# EAGLE board NixieBoard (EAGLE 9.6.2)
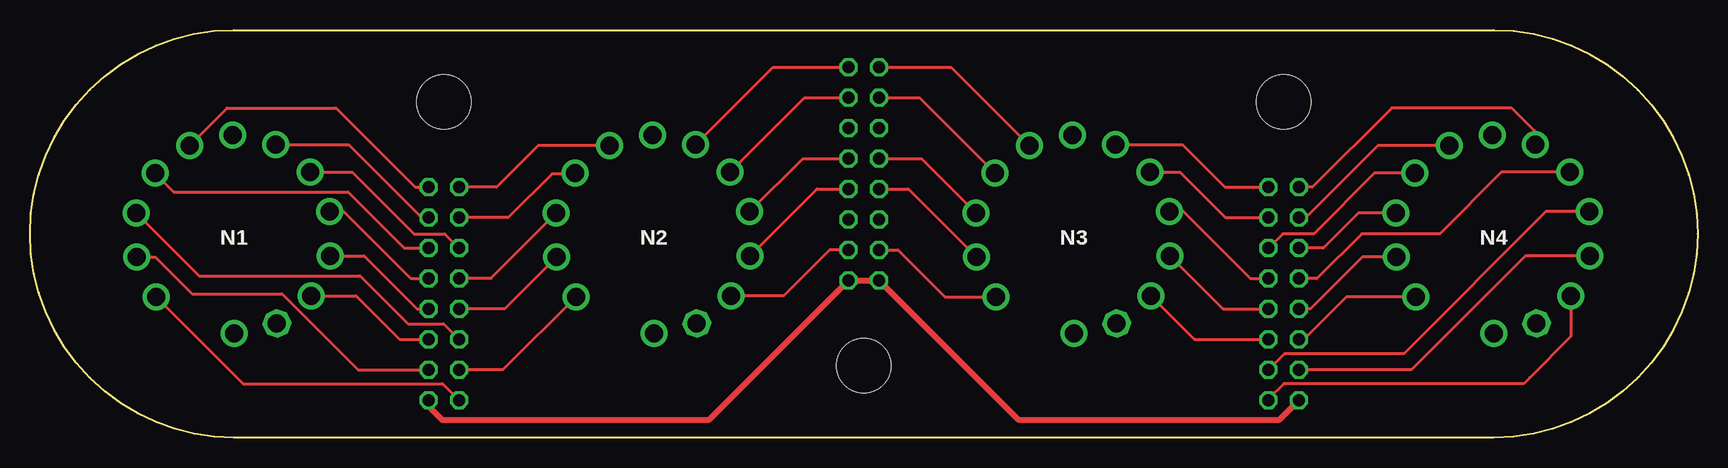
[diagram p0: board, top side]
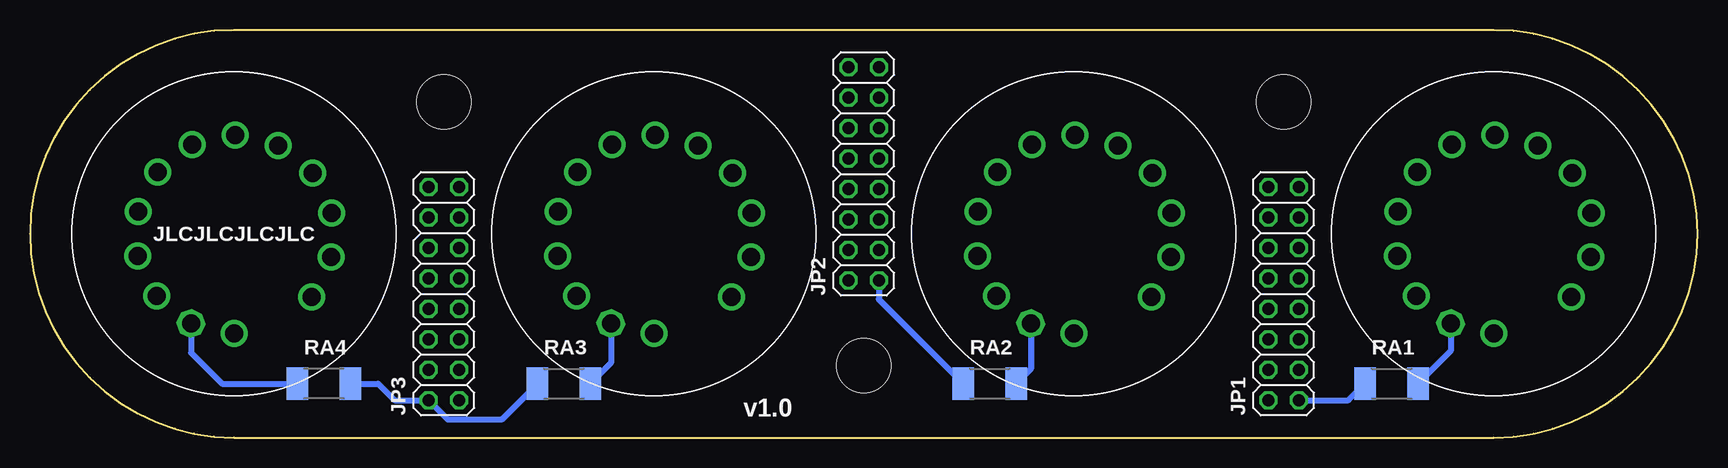
[diagram p1: board, bottom side, seen from below]

Size 139 x 34 mm. Coordinates in mm from the lower left corner, seen from the top.
Outline: 17,34 122,34 arc-180 122,0 17,0 arc-180 17,34
Copper layers (1*16): Top 0.035mm / dielectric 1.5mm / Bottom 0.035mm
Design rules "default": minimum track width 6mil, minimum drill 0.35mm, track to track 6mil, track to pad 6mil, pad to pad 6mil, via to via 6mil, smd to smd 6mil, copper to edge 40mil, drill to drill 6mil, minimum pad ring 10mil, minimum via ring 8mil, stop-mask expansion 4mil, vias tented up to drill 0mil, thermal gap 10mil
Holes 4.5 mm at 34.5,28 104.5,28 69.5,6

## Footprints (pad centres in the part's own frame; a part is rotated, then mirrored left to right if it is on the bottom)
2X08 = drill 1.016 octagon: 1 -8.89,-1.27; 2 -8.89,1.27; 3 -6.35,-1.27; 4 -6.35,1.27; 5 -3.81,-1.27; 6 -3.81,1.27; 7 -1.27,-1.27; 8 -1.27,1.27; 9 1.27,-1.27; 10 1.27,1.27; 11 3.81,-1.27; 12 3.81,1.27; 13 6.35,-1.27; 14 6.35,1.27; 15 8.89,-1.27; 16 8.89,1.27
F9057PIN = drill 1.5: 0 6.444,-5.171; 1 -6.493,-5.256; 2 -8.111,-1.95; 3 -8.134,1.73; 4 -6.559,5.056; 5 -3.696,7.37; 6 3.48,7.417; 7 6.373,5.142; 8 7.992,1.836; 9 8.018,-1.844; CI1 0,-8.33; CI2 -0.113,8.212 | drill 1.5 octagon: A 3.582,-7.486
R2010 = smd 1.8 x 2.7: 1 -2.2,0; 2 2.2,0

## Placement (x,y rotation side)
JP1  [2X08]  34.5,12 90 bottom
JP2  [2X08]  69.5,22 90 bottom
JP3  [2X08]  104.5,12 90 bottom
N1  F9057TUBE  [F9057PIN]  17,17 0 top
N2  F9057TUBE  [F9057PIN]  52,17 0 top
N3  F9057TUBE  [F9057PIN]  87,17 0 top
N4  F9057TUBE  [F9057PIN]  122,17 0 top
RA1  30k  [R2010]  25.5,4.5 0 bottom
RA2  47k  [R2010]  59,4.5 0 bottom
RA3  47k  [R2010]  94.5,4.5 0 bottom
RA4  47k  [R2010]  114.5,4.5 180 bottom

## Library data of the parts
JP1-JP3 = pinhead
N1-N4 = F9057
RA1-RA4 = rcl; SPICEPREFIX: R

## Nets
0XXX: JP1.5 N1.0
1XXX: JP1.2 N1.1
2XXX: JP1.3 N1.2
3XXX: JP1.6 N1.3
4XXX: JP1.11 N1.4
5XXX: JP1.15 N1.5
6XXX: JP1.13 N1.6
7XXX: JP1.12 N1.7
8XXX: JP1.9 N1.8
9XXX: JP1.7 N1.9
N$3: JP2.5
N$6: JP2.11
N$11: JP2.12
N$14: JP2.6
N$35: N4.A RA4.2
N$36: N3.A RA3.2
N$37: N2.A RA2.2
N$38: N1.A RA1.2
VCC_HV: JP1.1 JP2.1 JP2.2 JP3.2 RA1.1 RA2.1 RA3.1 RA4.1
X0XX: JP2.3 N2.0
X1XX: JP1.4 N2.1
X2XX: JP1.8 N2.2
X3XX: JP1.10 N2.3
X4XX: JP1.14 N2.4
X5XX: JP1.16 N2.5
X6XX: JP2.15 N2.6
X7XX: JP2.13 N2.7
X8XX: JP2.9 N2.8
X9XX: JP2.7 N2.9
XX0X: JP3.5 N3.0
XX1X: JP2.4 N3.1
XX2X: JP2.8 N3.2
XX3X: JP2.10 N3.3
XX4X: JP2.14 N3.4
XX5X: JP2.16 N3.5
XX6X: JP3.15 N3.6
XX7X: JP3.13 N3.7
XX8X: JP3.9 N3.8
XX9X: JP3.7 N3.9
XXX0: JP3.1 N4.0
XXX1: JP3.6 N4.1
XXX2: JP3.8 N4.2
XXX3: JP3.12 N4.3
XXX4: JP3.11 N4.4
XXX5: JP3.14 N4.5
XXX6: JP3.16 N4.6
XXX7: JP3.10 N4.7
XXX8: JP3.3 N4.8
XXX9: JP3.4 N4.9

## Tracks (layer width: path | path; a pad name or v marks a point on that pad's centre or on a via)
0XXX
  Top 0.254: JP1.5 30.81,8.19 27.17,11.83 N1.0
1XXX
  Top 0.254: N1.1 17.75,4.5 34.38,4.5 JP1.2
2XXX
  Top 0.254: N1.2 10.45,15.05 13.5,12 21,12 27.35,5.65 JP1.3
3XXX
  Top 0.254: N1.3 14.1,13.5 27.5,13.5 31.5,9.5 34.46,9.5 JP1.6
4XXX
  Top 0.254: N1.4 12,20.5 26.5,20.5 31.19,15.81 JP1.11
5XXX
  Top 0.254: N1.5 16.43,27.5 25.5,27.5 32.11,20.89 JP1.15
6XXX
  Top 0.254: N1.6 26.58,24.42 32.65,18.35 JP1.13
7XXX
  Top 0.254: N1.7 26.86,22.14 32,17 34.58,17 JP1.12
8XXX
  Top 0.254: N1.8 26.16,18.84 31.73,13.27 JP1.9
9XXX
  Top 0.254: N1.9 27.84,15.16 32.27,10.73 JP1.7
N$35
  Bottom 0.508: N4.A 125.58,7.08 123,4.5 RA4.2
N$36
  Bottom 0.508: N3.A 90.58,6.22 RA3.2
N$37
  Bottom 0.508: N2.A 55.58,5.72 RA2.2
N$38
  Bottom 0.508: N1.A 20.58,7.22 RA1.2
VCC_HV
  Top 0.508: JP1.1 33.23,2.61 34.37,1.47 56.59,1.47 JP2.1 JP2.2 82.38,1.5 104.16,1.5 JP3.2
  Bottom 0.508: JP2.1 68.23,11.53 RA2.1 | JP1.1 29.09,3.11 RA1.1 | RA4.1 110,4.5 108.61,3.11 JP3.2 104.16,1.5 99.7,1.5 RA3.1
X0XX
  Top 0.254: JP2.3 66.65,15.65 62.83,11.83 N2.0
X1XX
  Top 0.254: N2.1 39.41,5.65 JP1.4
X2XX
  Top 0.254: N2.2 39.57,10.73 JP1.8
X3XX
  Top 0.254: N2.3 38.41,13.27 JP1.10
X4XX
  Top 0.254: N2.4 45.38,22 43.5,22 39.85,18.35 JP1.14
X5XX
  Top 0.254: N2.5 42.37,24.37 38.89,20.89 JP1.16
X6XX
  Top 0.254: N2.6 61.95,30.89 JP2.15
X7XX
  Top 0.254: N2.7 64.58,28.35 JP2.13
X8XX
  Top 0.254: N2.8 64.43,23.27 JP2.9
X9XX
  Top 0.254: N2.9 65.59,20.73 JP2.7
XX0X
  Top 0.254: N3.0 97.08,8.19 JP3.5
XX1X
  Top 0.254: JP2.4 72.35,15.65 76.26,11.74 N3.1
XX2X
  Top 0.254: JP2.8 73.21,20.73 N3.2
XX3X
  Top 0.254: JP2.10 74.33,23.27 N3.3
XX4X
  Top 0.254: JP2.14 74.15,28.35 N3.4
XX5X
  Top 0.254: JP2.16 76.78,30.89 N3.5
XX6X
  Top 0.254: N3.6 96.08,24.42 99.61,20.89 JP3.15
XX7X
  Top 0.254: N3.7 95.86,22.14 99.65,18.35 JP3.13
XX8X
  Top 0.254: N3.8 96.16,18.84 101.73,13.27 JP3.9
XX9X
  Top 0.254: N3.9 99.44,10.73 JP3.7
XXX0
  Top 0.254: N4.0 128.44,8.44 125,5 124.5,4.5 104.5,4.5 103.23,3.23 JP3.1
XXX1
  Top 0.254: N4.1 109.74,11.74 106.19,8.19 JP3.6
XXX2
  Top 0.254: N4.2 111.05,15.05 106.73,10.73 JP3.8
XXX3
  Top 0.254: N4.3 110.73,18.73 107.81,15.81 JP3.12
XXX4
  Top 0.254: N4.4 112.06,22.06 107,17 104.42,17 JP3.11
XXX5
  Top 0.254: N4.5 112.37,24.37 106.35,18.35 JP3.14
XXX6
  Top 0.254: N4.6 125.48,25.52 123.5,27.5 113.5,27.5 106.89,20.89 JP3.16
XXX7
  Top 0.254: N4.7 122.64,22.14 117.5,17 111,17 107.27,13.27 JP3.10
XXX8
  Top 0.254: N4.8 126.34,18.84 114.5,7 104.58,7 JP3.3
XXX9
  Top 0.254: N4.9 124.66,15.16 115.15,5.65 JP3.4

## Text on the board
bNames: JLCJLCJLCJLC | v1.0